# EAGLE board usbDirectController1.5 (EAGLE 9.4.1)
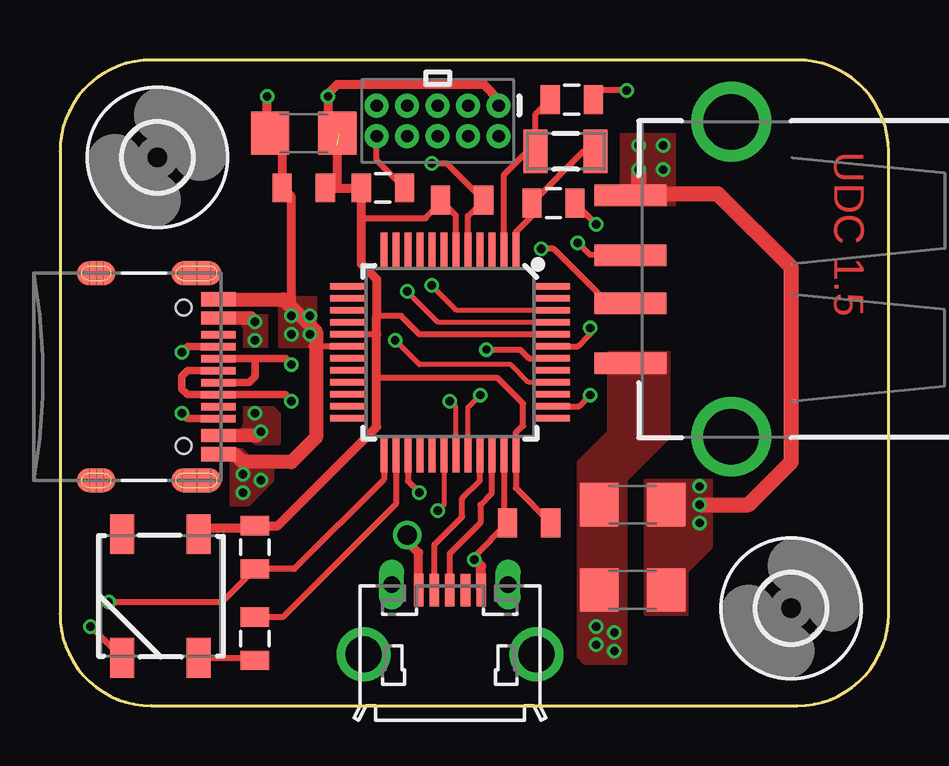
[diagram p0: board, top side]
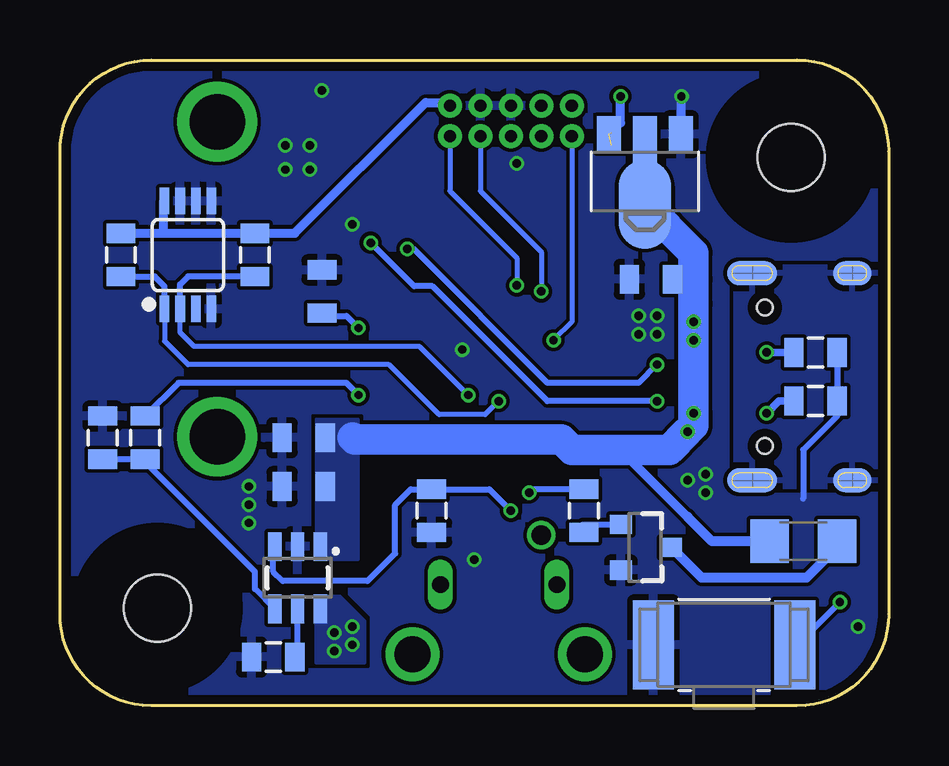
[diagram p1: board, bottom side, seen from below]

Size 34.54 x 26.92 mm. Coordinates in mm from the lower left corner, seen from the top.
Outline: 0,23.11 0,3.81 arc90 3.81,0 30.73,0 arc90 34.54,3.81 34.54,23.11 arc90 30.73,26.92 3.81,26.92 arc90 0,23.11
Copper layers (1*16): Top 0.035559375mm / dielectric 1.6mm / Bottom 0.035559375mm
Design rules "oshpark-2layer": minimum track width 6mil, minimum drill 10mil, track to track 6mil, track to pad 6mil, pad to pad 6mil, via to via 6mil, smd to smd 6mil, copper to edge 15mil, drill to drill 6mil, minimum pad ring 5mil, minimum via ring 5mil, stop-mask expansion 2.5mil, vias tented up to drill 0mil, thermal gap 10mil
Net classes: 0 default: width 0.203 mm, clearance 0.152 mm; 1 power: width 0.254 mm, clearance 0.203 mm; 3 usbsignal: width 0.254 mm, clearance 0.203 mm; 4 highpower: clearance 0.305 mm

## Footprints (pad centres in the part's own frame; a part is rotated, then mirrored left to right if it is on the bottom)
SOT23-6 = smd 0.55 x 1.2: 1 0.95,1.3; 2 0,1.3; 3 -0.95,1.3; 4 -0.95,-1.3; 5 0,-1.3; 6 0.95,-1.3
0805 = smd 0.8 x 1.2: 1 -0.9,0; 2 0.9,0
1206 = smd 1.6 x 1.8: 1 -1.4,0; 2 1.4,0
WS2812B = smd 1.651 x 1: 1 -2.577,1.6; 2 -2.577,-1.6; 3 2.577,-1.6; 4 2.577,1.6
2,8 = hole 2.8: 0,0
SOT89 = smd 1 x 1.5: 1 -1.499,-1.981; 3 1.499,-1.981 | smd 1 x 2: 2 0,-1.727 | smd 2.2 x 3.7: 2@1 0,0.94
USB-C-16P = smd 0.3 x 1.45: A5 -1.25,0; A6 -0.25,0; A7 0.25,0; A8 1.25,0; B5 1.75,0; B6 0.75,0; B7 -0.75,0; B8 -1.75,0 | smd 0.6 x 1.45: GND -3.225,0; GND2 3.225,0 | smd 1 x 2.1: SHLD1 -4.32,-0.915; SHLD2 4.32,-0.915 | smd 1 x 2.1 bottom: SHLD3 -4.32,-0.915; SHLD4 4.32,-0.915 | smd 1 x 1.6: SHLD5 -4.32,-5.095; SHLD8 4.32,-5.095 | smd 1 x 1.6 bottom: SHLD6 -4.32,-5.095; SHLD7 4.32,-5.095 | smd 0.55 x 1.45: VBUS1 -2.45,0; VBUS2 2.45,0 | hole 0.65: -2.89,-1.445; 2.89,-1.445
2X5-PTH-1.27MM = drill 0.508 pad 1: 1 -2.54,-0.635; 2 -2.54,0.635; 3 -1.27,-0.635; 4 -1.27,0.635; 5 0,-0.635; 6 0,0.635; 7 1.27,-0.635; 8 1.27,0.635; 9 2.54,-0.635; 10 2.54,0.635
MSOP8 = smd 0.4 x 1.1: 1 -0.975,-2.25; 2 -0.325,-2.25; 3 0.325,-2.25; 4 0.975,-2.25; 5 0.975,2.25; 6 0.325,2.25; 7 -0.325,2.25; 8 -0.975,2.25
SOT23-3 = smd 0.8 x 0.9: 1 -0.95,-1; 2 0.95,-1; 3 0,1.1
BTN_CK_KSS = smd 1.7 x 3.7: P$1 -2.95,0; P$2 2.95,0
TQFP-48 = smd 1.5 x 0.28: 1 -4.25,2.75; 2 -4.25,2.25; 3 -4.25,1.75; 4 -4.25,1.25; 5 -4.25,0.75; 6 -4.25,0.25; 7 -4.25,-0.25; 8 -4.25,-0.75; 9 -4.25,-1.25; 10 -4.25,-1.75; 11 -4.25,-2.25; 12 -4.25,-2.75; 25 4.25,-2.75; 26 4.25,-2.25; 27 4.25,-1.75; 28 4.25,-1.25; 29 4.25,-0.75; 30 4.25,-0.25; 31 4.25,0.25; 32 4.25,0.75; 33 4.25,1.25; 34 4.25,1.75; 35 4.25,2.25; 36 4.25,2.75 | smd 0.28 x 1.5: 13 -2.75,-4.25; 14 -2.25,-4.25; 15 -1.75,-4.25; 16 -1.25,-4.25; 17 -0.75,-4.25; 18 -0.25,-4.25; 19 0.25,-4.25; 20 0.75,-4.25; 21 1.25,-4.25; 22 1.75,-4.25; 23 2.25,-4.25; 24 2.75,-4.25; 37 2.75,4.25; 38 2.25,4.25; 39 1.75,4.25; 40 1.25,4.25; 41 0.75,4.25; 42 0.25,4.25; 43 -0.25,4.25; 44 -0.75,4.25; 45 -1.25,4.25; 46 -1.75,4.25; 47 -2.25,4.25; 48 -2.75,4.25
USB-A-S-SILK-FEMALE = smd 3 x 0.9: D+ 7.212,-1; D- 7.212,1; GND 7.212,-3.5; VBUS 7.212,3.5 | drill 2.311: SHLD1 3,-6.566; SHLD2 3,6.566
ZX62D-B-5PA8 = smd 1.35 x 0.4: 1 4.825,1.3; 2 4.825,0.65; 3 4.825,0; 4 4.825,-0.65; 5 4.825,-1.3 | drill 1.5: S1 2.15,-3.6; S2 2.15,3.6 | drill 0.7 long: S3 5.05,2.425; S4 5.05,-2.425
CRYSTAL-SMD-3.2X1.5MM = smd 1 x 1.8: P$1 -1.25,0; P$2 1.25,0

## Placement (x,y rotation side)
AP2553  MCP4725  [SOT23-6]  24.64,5.33 0 bottom
C1  0.1uF  [0805]  10.16,21.59 180 top
C2  0.1uF  [0805]  19.56,7.62 0 top
C3  0.1uF  [0805]  16.76,21.08 180 top
C4  15pF  [0805]  20.57,20.95 180 top
C5  15pF  [0805]  21.34,25.27 180 top
C6  0.1uF  [0805]  23.62,17.27 90 bottom
C7  1.0uF  [0805]  9.91,17.78 180 bottom
C8  1.0uF  [1206]  10.16,23.88 180 top
C10  10uF  [0805]  24.38,11.18 180 bottom
C11  0.1uF  [0805]  24.38,9.14 180 bottom
C12  1.0uF  [1206]  23.88,4.83 180 top
C13  120uF  [1206]  23.88,8.38 180 top
D2  [WS2812B]  4.19,4.57 270 top
H5  MOUNT-HOLE2.8  [2,8]  30.48,4.06 0 top
H8  MOUNT-HOLE2.8  [2,8]  4.06,22.86 0 top
IC1  MCP170312MB  [SOT89]  10.16,21.84 180 bottom
J1  [USB-C-16P]  6.6,13.72 270 top
J5  CORTEX_DEBUG_PTH  [2X5-PTH-1.27MM]  15.75,24.38 180 top
MCP9808  V_REG_MIC5216  [MSOP8]  29.21,18.8 0 bottom
Q8  200mA/50V  [SOT23-3]  10.16,6.6 270 bottom
R2  1k  [0805]  12.7,8.13 270 bottom
R5  10k  [0805]  8.13,6.6 270 top
R13  5.1k  [0805]  3.05,12.7 180 bottom
R14  5.1k  [0805]  3.05,14.73 180 bottom
R_DLOAD  1k  [1206]  3.56,6.86 180 bottom
R_I2C_1  10k  [0805]  26.42,18.8 270 bottom
R_I2C_2  10k  [0805]  32,18.8 90 bottom
R_LED  4.7k  [0805]  8.13,2.79 270 top
R_MOSFET_USB1  ? (1%)  [0805]  25.65,2.03 0 bottom
R_MOSFET_USB2  10k  [0805]  32.77,11.18 90 bottom
R_MOSFET_USB3  10k  [0805]  19.05,8.13 90 bottom
R_MOSFET_USB4  10k  [0805]  30.99,11.18 90 bottom
RRST  10k  [0805]  13.46,21.59 180 top
SW1  KSS221GLFS  [BTN_CK_KSS]  6.86,2.54 0 bottom
U1  ATSAMD21G-A  [TQFP-48]  16.26,14.73 270 top
USB_1  USB_A_SMT_FEMALE  [USB-A-S-SILK-FEMALE]  30.99,17.78 180 top
X2  ZX62D-B-5PA8  [ZX62D-B-5PA8]  16.26,0 90 top
Y2  32.768kHz  [CRYSTAL-SMD-3.2X1.5MM]  21.08,23.11 0 top

## Library data of the parts
AP2553 = SparkFun-IC-Conversion; PROD_ID: IC-08886
C1-C3 C6 C7 C10 C11 = SparkFun-Capacitors; PROD_ID: CAP-08064
C4 C5 R5 R13 R14 R_I2C_1 R_I2C_2 R_MOSFET_USB1-R_MOSFET_USB4 RRST = SparkFun-Passives
C8 C12 C13 = SparkFun-Capacitors; PROD_ID: CAP-09822
D2 = SparkFun-LED; PROD_ID: DIO-12503
H5 H8 = holes
IC1 = linear
J1 = SparkFun-Connectors; PROD_ID: CONN-14122
J5 = SparkFun-Connectors
MCP9808 = SparkFun-IC-Power; PROD_ID: IC-09527
Q8 = SparkFun-DiscreteSemi; PROD_ID: TRANS-00830
R2 R_DLOAD R_LED = SparkFun-Resistors
SW1 = adafruit
U1 = SparkFun-IC-Microcontroller; PROD_ID: IC-13064
USB_1 = SparkFun-Connectors; PROD_ID: CONN-09520; SF_ID: PRT-09011
X2 = zx62d-b-5pa8-oshpark_10; MF: Hirose; MPN: ZX62D-B-5PA8; OC_FARNELL: 2300438; OC_NEWARK: 69W0712
Y2 = samd21-temp; PROD_ID: XTAL-13062

## Nets
BTN: R5.2 SW1.P$2 U1.25
CC1: J1.A5 R14.2
CC2: J1.B5 R13.2
DM: J1.A7 J1.B7 USB_1.D-
DP: J1.A6 J1.B6 USB_1.D+
DUMMY_LOAD: R2.1 U1.27
GND: AP2553.2 C1.2 C2.1 C3.1 C4.1 C5.1 C6.2 C7.2 C8.2 C10.2 C11.2 C12.1 C13.1 D2.3 IC1.1 J1.GND J1.GND2 J5.3 J5.5 MCP9808.4 MCP9808.5 MCP9808.6 MCP9808.7 Q8.2 R13.1 R14.1 R_MOSFET_USB1.1 R_MOSFET_USB2.2 R_MOSFET_USB3.1 SW1.P$1 U1.5 U1.18 U1.35 U1.42 USB_1.GND X2.5
LED: R_LED.1 U1.26
MICRO_DM: U1.33 X2.2
MICRO_DP: U1.34 X2.3
MICRO_VBUS: X2.1
N$1: C6.1 U1.43
N$2: MCP9808.3
N$3: AP2553.5 R_MOSFET_USB1.2
N$5: AP2553.4 R_MOSFET_USB2.1 R_MOSFET_USB4.1
N$7: D2.4 R_LED.2
N$8: C4.2 U1.1 Y2.P$2
N$10: Q8.1 R2.2
N$11: Q8.3 R_DLOAD.1
N$32: C5.2 U1.2 Y2.P$1
RESET: J5.10 RRST.1 U1.40
SCL: MCP9808.2 R_I2C_1.2 U1.32
SDA: MCP9808.1 R_I2C_2.1 U1.31
SHLD: J1.SHLD1 J1.SHLD2 J1.SHLD3 J1.SHLD4 J1.SHLD5 J1.SHLD6 J1.SHLD7 J1.SHLD8
SWDCLK: J5.4 U1.45
SWDIO: J5.2 U1.46
USB1_EN: AP2553.3 R_MOSFET_USB3.2 U1.30
USB1_OUT: AP2553.6 C12.2 C13.2 USB_1.VBUS
USB2_EN: U1.28
USB_5V [highpower]: AP2553.1 C7.1 C10.1 C11.1 IC1.2@1 J1.VBUS1 J1.VBUS2 R_DLOAD.2
USB_FAULT: R_MOSFET_USB4.2 U1.38
VCC [power]: C1.1 C2.2 C3.2 C8.1 D2.1 IC1.3 J5.1 MCP9808.8 R5.1 R_I2C_1.1 R_I2C_2.2 RRST.2 U1.6 U1.17 U1.36 U1.44

## Tracks (layer width: path | path; a pad name or v marks a point on that pad's centre or on a via)
BTN  (via drill 0.35)
  Top 0.254: U1.25 13.51,9.44 9.77,5.7 R5.2 6.74,4.32 v2.03,4.32
  Bottom 0.254: SW1.P$2 3.81,2.54 v2.03,4.32
CC1  (via drill 0.35)
  Top 0.305: J1.A5 5.31,14.97 v5.08,14.73
  Bottom 0.305: v5.08,14.73 R14.2
CC2  (via drill 0.35)
  Top 0.305: J1.B5 5.31,11.97 v5.08,12.19
  Bottom 0.305: v5.08,12.19 4.57,12.7 R13.2
DM  (via drill 0.35)
  Top 0.254: USB_1.D- 22.84,16.78 20.57,19.05 v20.07,19.05
  Top 0.305: J1.B7 8.13,14.47 | 8.13,14.47 9.41,14.47 v9.65,14.22 | J1.A7 7.88,13.47 8.13,13.72 8.13,14.47
  Bottom 0.254: v20.07,19.05 19.81,19.05 14.22,13.46 10.41,13.46 v9.65,14.22
DP  (via drill 0.35)
  Top 0.254: USB_1.D+ 23.76,18.8 22.1,18.8 v21.59,19.3
  Top 0.305: J1.A6 5.33,13.97 5.08,13.72 5.08,13.21 5.32,12.97 J1.B6 9.39,12.97 v9.65,12.7
  Bottom 0.254: v21.59,19.3 19.78,17.49 19.02,17.49 14.22,12.7 v9.65,12.7
DUMMY_LOAD  (via drill 0.35)
  Top 0.254: U1.27 14.51,9.37 v14.99,8.89
  Bottom 0.254: R2.1 14.85,9.03 v14.99,8.89
GND  (via drill 0.35)
  Top 0.254: D2.3 1.28,3.3 v1.27,3.3 | U1.18 10.67,14.98 10.67,14.99 | U1.5 17.01,20.42 C3.1 16.14,22.61 v15.49,22.61 | v23.62,25.65 22.62,25.65 C5.1 | U1.35 18.51,7.77 C2.1 17.27,6.23 v17.27,6.1 | v22.35,20.07 v22.35,20.08 C4.1 | U1.42 19.55,14.48 19.19,14.85 v17.78,14.85
  Top 0.381: v8.64,25.4 8.64,24 C8.2 9.26,23.38 C1.2 9.65,21.2 v9.65,16.26
  Top 0.406: X2.5 17.56,5.81 v17.27,6.1
  Top 0.559: J1.GND2 7.29,10.49
  Top 0.584: J1.GND 9.32,16.94 10.67,15.59 10.67,14.99 10.67,11.18 9.65,10.16 7.62,10.16 7.29,10.49
  Top 0.635: v26.67,8.38 28.7,8.38 30.48,10.16 30.48,18.29 27.43,21.34 24.38,21.34 24.13,21.59 v24.13,22.35
  Bottom 0.254: R14.1 R13.1 2.15,12.08 3.56,10.67 3.56,8.64
  Bottom 0.381: v8.64,25.4 8.66,25.38 IC1.1
  other vias: 7.62,8.89 7.62,9.65 8.38,9.4 26.67,9.14 24.13,23.37 25.15,22.35 25.15,23.37 26.67,7.62 9.65,15.49 10.41,16.26 10.41,15.49
  pour Bottom (rank 2): 0,0 35.05,0 35.05,26.92 0,26.92
  pour Top (no thermals): 25.65,20.83 23.37,20.83 23.37,23.88 25.65,23.88
  pour Top (no thermals): 7.11,10.16 7.11,8.38 7.87,8.38 8.89,9.4 8.89,10.41 7.87,10.41 7.62,10.67 7.11,10.67
  pour Top (no thermals): 24.38,3.81 26.16,3.81 26.16,5.59 27.18,6.6 27.18,9.4 24.38,9.4
  pour Top: 9.14,17.02 9.14,14.99 10.67,14.99 10.67,17.02
LED
  Top 0.254: U1.26 14.01,8.42 9.28,3.69 R_LED.1
MICRO_DM
  Top 0.254: U1.33 17.51,9.38 16.76,8.64 16.76,7.87 15.61,6.72 X2.2
MICRO_DP
  Top 0.254: X2.3 16.26,6.35 17.53,7.62 17.53,8.38 18.01,8.86 U1.34
MICRO_VBUS  (via drill 0.8)
  Top 0.381: X2.1 14.96,6.38 14.48,6.86 v14.48,7.11
N$1  (via drill 0.35)
  Top 0.254: U1.43 21.59,14.98 22.1,15.49 v22.1,15.75
  Bottom 0.254: v22.1,15.75 22.61,16.26 23.55,16.26 23.56,16.31 C6.1
N$3
  Bottom 0.254: R_MOSFET_USB1.2 24.64,2.15 AP2553.5
N$5
  Bottom 0.254: AP2553.4 26.42,4.86 26.42,5.59 30.99,10.16 R_MOSFET_USB4.1 R_MOSFET_USB2.1
N$7
  Top 0.254: D2.4 8.03,2 R_LED.2
N$8
  Top 0.254: U1.1 19.01,19.74 19.67,20.41 C4.2 21.83,23.11 Y2.P$2
N$10
  Bottom 0.254: R2.2 12.75,7.55 Q8.1
N$11
  Bottom 0.406: R_DLOAD.1 2.16,6.6 3.43,5.33 7.79,5.33 Q8.3
N$32
  Top 0.254: U1.2 18.51,22.13 19.49,23.11 Y2.P$1 19.83,24.67 C5.2
RESET  (via drill 0.35)
  Top 0.203: U1.40 19.54,13.48 18.8,14.22 14.99,14.22 v13.97,15.24
  Top 0.254: RRST.1 13.21,22.74 J5.10
  Bottom 0.203: v13.97,15.24 13.21,16 J5.10
SCL  (via drill 0.35)
  Top 0.203: U1.32 17.01,12.43 v17.53,12.95
  Bottom 0.203: v17.53,12.95 19.56,14.99 28.96,14.99 29.54,15.56 MCP9808.2
  Bottom 0.254: MCP9808.2 29.54,17.56 29.2,17.9 R_I2C_1.2
SDA  (via drill 0.35)
  Top 0.203: U1.31 16.51,12.45 v16.26,12.7
  Bottom 0.203: v16.26,12.7 16.82,12.13 18.74,12.13 20.83,14.22 29.21,14.22 30.18,15.2 MCP9808.1
  Bottom 0.254: R_I2C_2.1 30.6,17.9 30.18,17.48 MCP9808.1
SHLD
  pour Bottom: 0,9.14 6.35,9.14 6.35,18.29 0,18.29
SWDCLK  (via drill 0.35)
  Top 0.203: U1.45 15.77,15.98 v14.48,17.27
  Bottom 0.203: J5.4 17.02,21.46 14.48,18.92 v14.48,17.27
SWDIO  (via drill 0.35)
  Top 0.203: U1.46 16.54,16.48 v15.5,17.52
  Bottom 0.203: J5.2 18.29,21.46 15.5,18.67 v15.5,17.52
USB1_EN  (via drill 0.35)
  Top 0.203: U1.30 16.01,8.39 v15.75,8.13
  Bottom 0.254: AP2553.3 25.65,6.57 25.65,5.59 25.26,5.2 21.73,5.2 20.57,6.35 20.57,8.38 19.93,9.03 R_MOSFET_USB3.2 16.65,9.03 v15.75,8.13
USB1_OUT  (via drill 0.35)
  other vias: 22.35,2.54 23.11,2.29 22.35,3.3 23.11,3.05
  pour Bottom (no thermals): 23.88,4.57 22.86,4.57 21.84,3.56 21.84,1.78 23.88,1.78
  pour Top (no thermals): 25.4,14.73 22.86,14.73 22.86,11.43 21.59,10.16 21.59,2.03 21.84,1.78 23.62,1.78 23.62,9.4 25.4,11.18
USB_5V  (via drill 0.35)
  Top 0.254: 7.96,16.17 v8.13,16
  Top 0.559: J1.VBUS1 7.96,16.17 | J1.VBUS2 8.22,11.27 v8.38,11.43
  Bottom 0.254: C7.1 8.13,17.78 | v8.13,16 8.13,16.76
  Bottom 0.381: 8.38,7.87 11.18,10.67
  Bottom 0.406: R_DLOAD.2 7.37,6.86 8.38,7.87
  Bottom 1.27: IC1.2@1 8.13,18.87 8.13,17.78 8.13,16.76 v8.13,12.19 8.13,11.68 v8.38,11.43 9.14,10.67 11.18,10.67 13.21,10.67 13.63,11.09 22.27,11.09 22.35,11.18
  other vias: 8.13,15.24
  pour Top (no thermals): 7.62,12.45 8.89,12.45 9.14,12.19 9.14,10.92 8.13,10.92 7.62,11.43
  pour Top (no thermals): 7.62,14.99 8.64,14.99 8.64,16.26 7.62,16.26
  pour Bottom (no thermals): 23.88,6.1 22.1,6.1 22.1,11.94 23.88,11.94
USB_FAULT  (via drill 0.35)
  Top 0.254: U1.38 21.63,12.48 v22.1,12.95
  Bottom 0.254: R_MOSFET_USB4.2 29.6,13.46 22.61,13.46 v22.1,12.95
VCC  (via drill 0.35)  (2 unrouted)
  Top 0.254: D2.1 6.04,7.4 | 8.03,7.4 R5.1 | 13.21,15.48 U1.17 | U1.36 19.01,11.39 19.3,11.68 19.3,12.6 18.24,13.66 13.26,13.66 13.21,13.72 | U1.44 15,15.48 14.22,16.26 13.21,16.26 | U1.36 19.01,10.41 | U1.6 16.51,20.44 C3.2 15.86,20.94 15.24,20.32 12.56,20.32 | U1.36 19.01,9.07 C2.2
  Top 0.381: 8.03,7.4 6.04,7.4 | R5.1 9.08,7.5 13.21,11.63 13.21,13.72 13.21,15.48 13.21,16.26 13.21,17.78 12.56,18.43 12.56,20.32 RRST.2 | RRST.2 11.68,21.59 11.56,21.71 11.56,23.37 | J5.1 18.29,25.27 17.65,25.91 11.57,25.91 11.18,25.52 v11.18,25.4 11.18,24.26 C8.1 | C1.1 RRST.2
  Bottom 0.381: 11.18,24.31 v11.18,25.4 | J5.1 18.41,25.15 19.3,25.15 24.75,19.7 R_I2C_1.1 30.23,19.7 | MCP9808.8 30.23,21 30.23,19.7 | R_I2C_2.2 30.23,19.7

## Text on the board
Top: UDC 1.5